# EAGLE board usbDac (EAGLE 6.4)
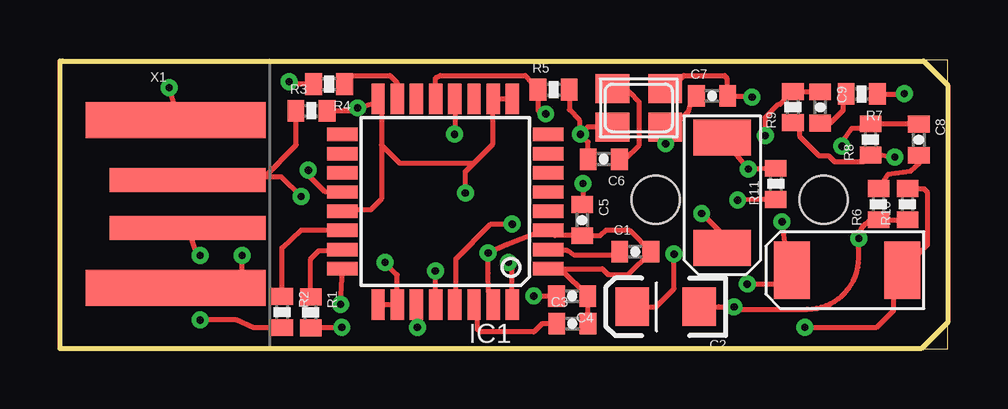
[diagram p0: board, top side]
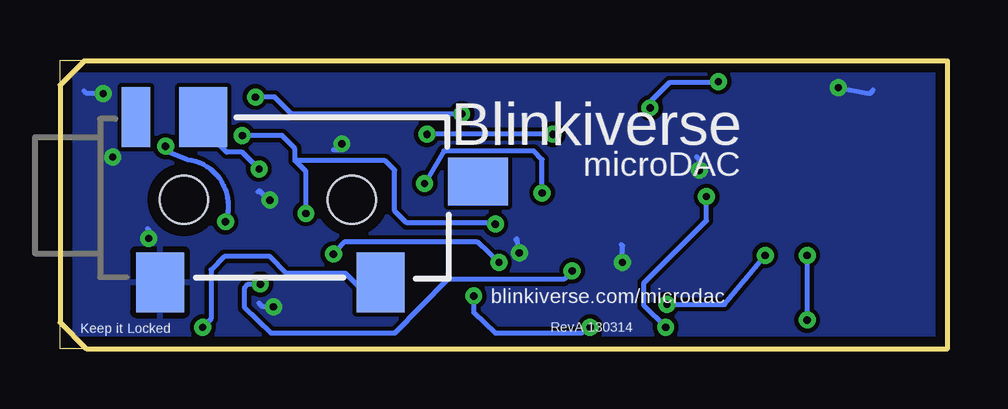
[diagram p1: board, bottom side, seen from below]

Size 37 x 12.05 mm. Coordinates in mm from the lower left corner, seen from the top.
Outline: 0,0 37,0 37,12.05 0,12.05 0,0
Copper layers (1*16): Top 0.035mm / dielectric 1.5mm / Bottom 0.035mm
Design rules "default *": minimum track width 8mil, minimum drill 24mil, track to track 7mil, track to pad 7mil, pad to pad 7mil, via to via 7mil, smd to smd 8mil, copper to edge 20mil, drill to drill 8mil, minimum pad ring 10mil, minimum via ring 8mil, stop-mask expansion 4mil, vias tented up to drill 0mil, thermal gap 10mil
Milling: 6 lines

## Footprints (pad centres in the part's own frame; a part is rotated, then mirrored left to right if it is on the bottom)
0402-CAP = smd 0.7 x 0.9: 1 -0.65,0; 2 0.65,0
EIA3216 = smd 1.4 x 1.6: A 1.4,0; C -1.4,0
EIA6032 = smd 1.5 x 2.4: P$1 -2.3,0; P$2 2.3,0
TQFP32 = smd 1.27 x 0.559: 1 -4.293,2.8; 2 -4.293,2; 3 -4.293,1.2; 4 -4.293,0.4; 5 -4.293,-0.4; 6 -4.293,-1.2; 7 -4.293,-2; 8 -4.293,-2.8; 17 4.293,-2.8; 18 4.293,-2; 19 4.293,-1.2; 20 4.293,-0.4; 21 4.293,0.4; 22 4.293,1.2; 23 4.293,2; 24 4.293,2.8 | smd 0.559 x 1.27: 9 -2.8,-4.293; 10 -2,-4.293; 11 -1.2,-4.293; 12 -0.4,-4.293; 13 0.4,-4.293; 14 1.2,-4.293; 15 2,-4.293; 16 2.8,-4.293; 25 2.8,4.293; 26 2,4.293; 27 1.2,4.293; 28 0.4,4.293; 29 -0.4,4.293; 30 -1.2,4.293; 31 -2,4.293; 32 -2.8,4.293
NX3225 = smd 1.4 x 1.2: 1 -1.1,-0.8; 2 1.1,-0.8; 3 1.1,0.8; 4 -1.1,0.8
0402-RES = smd 0.7 x 0.9: 1 -0.65,0; 2 0.65,0
AUDIO-JACK-3.5MM-SMD = smd 2 x 2.5: RING 4.3,3.45; SLEEVE 2.5,-3.45; TIP 11.7,-3.45 | smd 1.2 x 2.5: RSH 1.5,3.45 | smd 2.5 x 2: TSH 15.75,0.75 | hole 2: 3.5,0; 10.5,0
USB-A-PCB = smd 7.5 x 1.5: 5V -0.2,-3.5; GND -0.2,3.5 | smd 6.5 x 1: USB_M 0.3,-1; USB_P 0.3,1

## Placement (x,y rotation side)
C1  1uF  [0402-CAP]  23.98,4.05 0 top
C2  10uF  [EIA3216]  25.25,1.75 180 top
C3  1uF  [0402-CAP]  21.36,1.05 0 top
C4  1uF  [0402-CAP]  21.35,2.2 180 top
C5  1uF  [0402-CAP]  21.77,5.37 270 top
C6  [0402-CAP]  22.67,7.91 180 top
C7  [0402-CAP]  27.18,10.55 0 top
C8  1uF  [0402-CAP]  35.8,8.72 270 top
C9  1uF  [0402-CAP]  31.69,10.07 270 top
C10  100uF  [EIA6032]  27.61,6.51 90 top
C11  100uF  [EIA6032]  32.82,3.28 0 top
IC1  [TQFP32]  16.06,6.14 180 top
Q1  [NX3225]  24.13,10.05 0 top
R1  22  [0402-RES]  10.45,1.52 270 top
R2  22  [0402-RES]  9.26,1.53 270 top
R3  1k5  [0402-RES]  10.48,9.93 0 top
R4  1k5  [0402-RES]  11.22,11.04 180 top
R5  1M  [0402-RES]  20.58,10.81 0 top
R6  16  [0402-RES]  34.12,6.03 90 top
R7  16  [0402-RES]  33.42,10.63 180 top
R8  3k3  [0402-RES]  33.79,8.73 90 top
R9  3k3  [0402-RES]  30.55,10.08 90 top
R10  3k3  [0402-RES]  35.33,6.03 90 top
R11  3k3  [0402-RES]  29.84,6.88 90 top
U1  [AUDIO-JACK-3.5MM-SMD]  35.33,6.22 0 bottom
X1  USBPCB  [USB-A-PCB]  5.03,6.05 0 top

## Library data of the parts
C1-C11 = SparkFun-Capacitors
IC1 = PCM2706
Q1 = adafruit
R1-R11 = SparkFun-Passives
U1 = SparkFun-Connectors
X1 = SparkFun

## Nets
GND: C1.2 C2.C C3.2 C4.1 C5.2 C7.1 IC1.1 IC1.3 IC1.20 IC1.25 IC1.26 IC1.31 Q1.2 R6.1 R7.1 R8.1 R9.1 R10.1 R11.1 U1.SLEEVE X1.GND
MUTE: IC1.6
N$1: C3.1 IC1.30
N$2: C1.1 IC1.2
N$3: C2.A IC1.32
N$4: C4.2 IC1.27
N$6: IC1.23 R1.1
N$7: IC1.22 R2.1
N$8: R1.2 R3.1 X1.USB_P
N$9: R2.2 X1.USB_M
N$10: C7.2 IC1.13 Q1.3 R5.1
N$11: IC1.15 R4.1
N$12: C9.1 C10.P$1 IC1.29 R9.2
N$13: C6.1 Q1.4
N$14: C8.1 C11.P$1 IC1.28 R8.2
N$15: C6.2 IC1.12 Q1.1 R5.2
N$16: C8.2 R6.2
N$17: C9.2 R7.2
N$18: C11.P$2 R10.2 U1.TIP
N$19: C10.P$2 R11.2 U1.RING
PLAY: IC1.5
VCC: IC1.24 X1.5V
VDD: C5.1 IC1.9 IC1.10 IC1.16 IC1.21 R3.2 R4.2
VDN: IC1.8
VUP: IC1.7

## Tracks (layer width: path | path; a pad name or v marks a point on that pad's centre or on a via)
GND  (via drill 0.3)
  Top 0.203: R10.1 R6.1 34.03,5.38 arc90 v33.3,4.6 33.3,3.8 arc-90 31.15,1.65 28.35,1.65 v28.1,1.75 27.45,1.75 C2.C | X1.GND 4.83,10.02 v4.55,10.9 | IC1.20 11.06,6.54 10.35,7.25 v10.35,7.45 | IC1.25 IC1.26 14.06,3.09 v13.55,3.6 | IC1.31 17.86,2.39 17.85,3.15 v17.85,4 18.65,4.35 20.29,5 IC1.3 20.62,4.72 C5.2 22.52,4.72 22.75,4.95 23.73,4.95 C1.2 23.68,3.1 22.85,3.1 22.61,3.34 20.86,3.34 | C3.2 C4.1 20.86,3.34 | v25.25,8.55 25.23,8.47 Q1.2 25.55,9.25 26.2,9.9 26.3,10.22 C7.1 | R8.1 33.79,8.04 | R7.1 35.18,10.63 v35.2,10.65 | R11.1 29.12,6.23 v28.25,6.2 | R8.1 34.27,8.08 v34.8,8 | R9.1 30.85,9.13 30.85,8.85 31.65,8.05 32.05,8.05 32.3,7.8 33.51,7.8 R8.1 | IC1.1 20.86,3.34
  Bottom 0.203: v4.55,10.9 3.25,10.65 3.1,10.8 | v10.35,7.45 10.35,7.9 10.45,8 | v13.55,3.6 13.55,4.3 13.6,4.35 | v17.85,4 17.95,4.6 18,4.55 | v25.25,8.55 25.25,8.3 25.6,8.3 | 28.75,6.55 28.7,6.6 28.3,6.2 v28.25,6.2 | v35.2,10.65 35.9,10.65 36,10.75 | v28.1,1.75 28.55,1.75 28.7,1.9 | v34.8,8 34.9,8.15 | v33.3,4.6 33.3,4.95 arc-90 33.35,5
  pour Bottom: 0.25,11.9 36.95,11.9 36.95,0.25 0.35,0.25 0.35,11.85
N$1
  Top 0.203: C3.1 20.1,1.05 19.75,0.7 17.5,0.7 17.4,0.8 17.4,1.71 IC1.30
N$2
  Top 0.203: IC1.2 20.39,4.1 21.15,4.1 21.45,3.9 23.08,3.9 C1.1
N$3  (via drill 0.3)
  Top 0.203: IC1.32 18.85,3.35 18.7,3.5 v18.7,3.6 | C2.A 24.85,1.75 25.6,2.5 v25.6,3.95
  Bottom 0.203: v18.7,3.6 19.6,4.45 25.15,4.45 25.45,4.15 arc-40 v25.6,3.95
N$4  (via drill 0.3)
  Top 0.203: 14.9,1.89 IC1.27 | 15,1.99 14.9,1.89 | 14.9,1.89 v14.9,0.9 | v19.75,2.2 C4.2
  Bottom 0.203: v14.9,0.9 15.25,0.65 18.85,0.65 19.75,1.5 v19.75,2.2
N$6
  Top 0.203: R1.1 10.45,3.75 10.8,4.1 11.73,4.1 IC1.23
N$7
  Top 0.203: R2.1 9.26,4.21 10.05,4.95 11.76,4.95 IC1.22
N$8  (via drill 0.3)
  Top 0.203: X1.USB_P 8.4,7.05 8.53,7.17 | 8.53,7.17 9.85,8.5 9.85,9.91 R3.1 | 10.62,0.7 R1.2 10.48,0.9 v11.75,0.9 | v10.05,6.35 9.22,7.17 8.53,7.17
  Bottom 0.203: v11.75,0.9 12.65,1.8 12.65,2.75 10.05,5.35 v10.05,6.35
N$9  (via drill 0.3)
  Top 0.203: v5.85,3.9 5.68,4.05 X1.USB_M | R2.2 8.07,0.88 7.35,1.2 v5.85,1.2
  Bottom 0.203: v5.85,1.2 v5.85,3.9
N$10  (via drill 0.3)
  Top 0.203: IC1.13 15.66,11.31 15.85,11.4 19.39,11.4 R5.1 19.93,9.92 20,9.85 v20.25,9.8 | 25.51,11.13 Q1.3 25.58,10.5 25.58,10.98 26,11.4 27.7,11.4 27.8,11.3 27.8,10.58 C7.2 28.8,10.55 v28.85,10.5
  Bottom 0.203: v20.25,9.8 27.35,9.8 28.05,10.5 v28.85,10.5
N$11
  Top 0.203: R4.1 11.87,11.22 12.05,11.4 13.75,11.4 14.05,11.1 14.05,10.44 IC1.15
N$12  (via drill 0.3)
  Top 0.203: IC1.29 16.5,1.89 16.5,3.75 17.95,5.2 v18.85,5.2 | C10.P$1 28,4.6 27.8,4.6 v26.75,5.65 | v29.4,8.9 29.4,9.65 29.95,10.2 30.02,10.2 R9.2 C9.1
  Bottom 0.203: v18.85,5.2 18.9,5.25 22.55,5.25 23.05,5.75 23.05,7.45 23.45,7.85 27.2,7.85 | 27.2,7.85 27.2,8.35 27.75,8.9 v29.4,8.9 | v26.75,5.65 26.75,7.4 27.2,7.85
N$13
  Top 0.203: C6.1 23.56,7.91 24.15,8.5 24.15,10.3 23.75,10.7 23.18,10.7 Q1.4
N$14  (via drill 0.3)
  Top 0.203: IC1.28 v15.65,3.25 | v28.65,2.7 29.95,2.7 30.42,3.79 | 30.42,3.79 30.6,4.2 30.6,3.36 C11.P$1 | C8.1 R8.2 33.46,9.2 33,9.2 32.6,8.6 v32.6,8.45 | v30.1,5.3 30.25,3.96 arc90 30.42,3.79
  Bottom 0.203: v32.6,8.45 32.6,8.25 31.7,7.9 arc90 30,5.75 v30.1,5.3 | v15.65,3.25 16,2.9 20.85,2.9 23.05,0.65 28.2,0.65 29.3,1.7 29.3,2.55 29.15,2.7 v28.65,2.7
N$15  (via drill 0.3)
  Top 0.203: IC1.12 v16.46,8.96 v16.45,8.95 | Q1.1 22,9.25 v21.7,8.95 | C6.2 22.02,8.63 v21.7,8.95 | R5.2 21.23,9.97 21.65,9.55 21.65,9 v21.7,8.95
  Bottom 0.203: v16.45,8.95 v21.7,8.95
N$16
  Top 0.203: C8.2 35.82,7.72 35.45,7.4 34.5,7.26 R6.2
N$17
  Top 0.203: C9.2 32.12,9.42 32.65,9.95 32.65,10.51 R7.2
N$18  (via drill 0.3)
  Top 0.203: v31.05,0.9 34.05,0.9 34.75,1.6 34.75,2.91 C11.P$2 36.15,4.31 36.15,6.55 36.02,6.68 R10.2
  Bottom 0.203: 24.2,2.25 24.2,2.35 23.78,2.77 U1.TIP | 24.2,2.15 24.2,2.25 | 24.2,2.25 25.1,3.15 27.55,3.15 28.25,3.85 30.15,3.85 30.7,3.3 30.7,1.25 v31.05,0.9
N$19  (via drill 0.3)
  Top 0.203: 27.18,8.38 C10.P$2 28.62,7.6 v28.7,7.5 29.19,7.49 R11.2
  Bottom 0.203: v28.7,7.5 29.4,8.2 30.05,8.2 30.45,8.6 30.45,9.05 31.03,9.63 U1.RING
VCC  (via drill 0.3)
  Top 0.203: X1.5V 7.6,2.55 v7.6,3.9 | v11.7,1.85 11.75,2.96 IC1.24
  Bottom 0.203: v11.7,1.85 9.3,1.85 v7.6,3.9
VDD  (via drill 0.3)
  Top 0.203: 13.4,8.5 13.4,6.25 12.95,5.8 11.83,5.8 IC1.21 | 13.4,8.5 13.4,10.43 IC1.16 13.08,10.25 v12.4,10.05 12.18,9.93 R3.2 | 13.4,8.5 14.15,7.75 17.25,7.75 | 17.25,7.75 18.05,8.55 IC1.10 IC1.9 | R4.2 9.96,11.04 v9.55,11.15 | v16.9,6.5 16.9,7.4 17.25,7.75 | C5.1 21.82,6.22 v21.8,6.9
  Bottom 0.203: v16.9,6.5 16.9,7.9 17.25,8.25 21,8.25 21.7,7.05 v21.8,6.9 | v9.55,11.15 9.6,11.1 11.6,11.1 12.4,10.3 v12.4,10.05

## Text on the board
bPlace: Blinkiverse | microDAC | blinkiverse.com/microdac | RevA 130314 | Keep it Locked